# Altium PCB 192dRGB - Copy.PcbDoc
Units mm, origin at the board's own origin, x right, y up, seen from the top; angles counter-clockwise.
Board outline 220.09 x 132.84 mm, 2 copper layers (Top Layer, Bottom Layer); 81 components, 148 nets, 290 pads, 0 vias.
Unrouted connection lines stored in the file: 9.
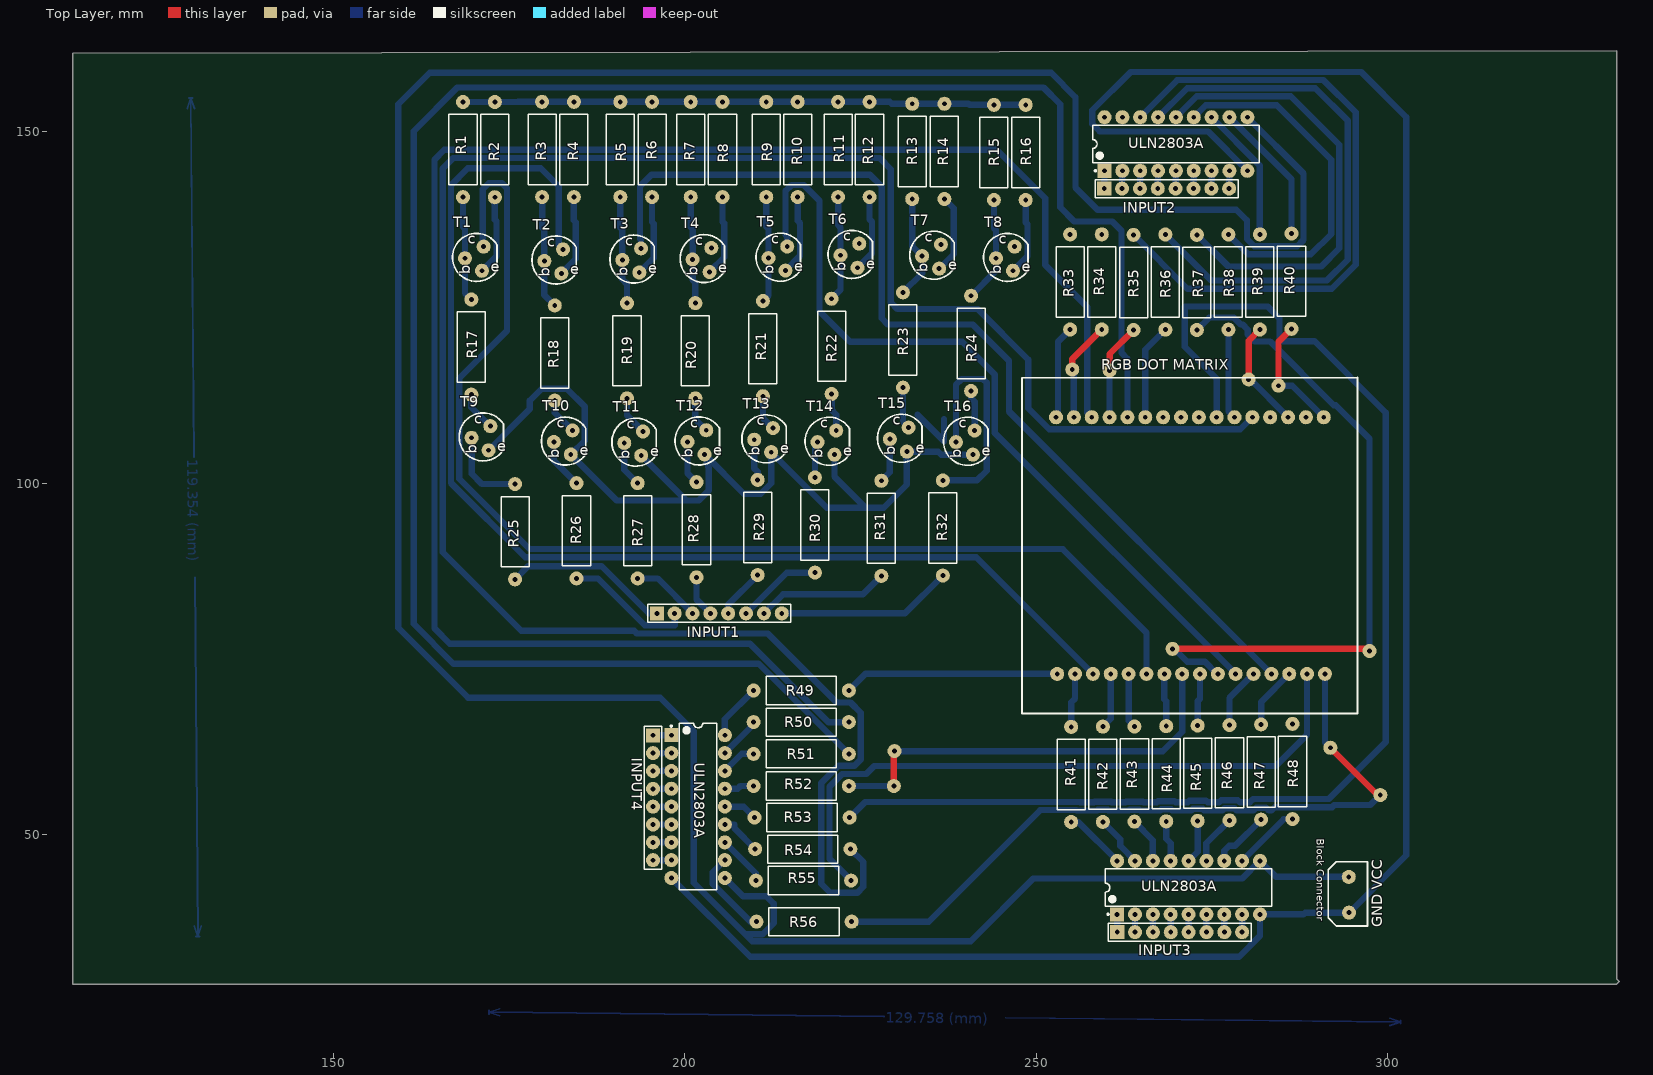
[diagram p0: Top Layer view]
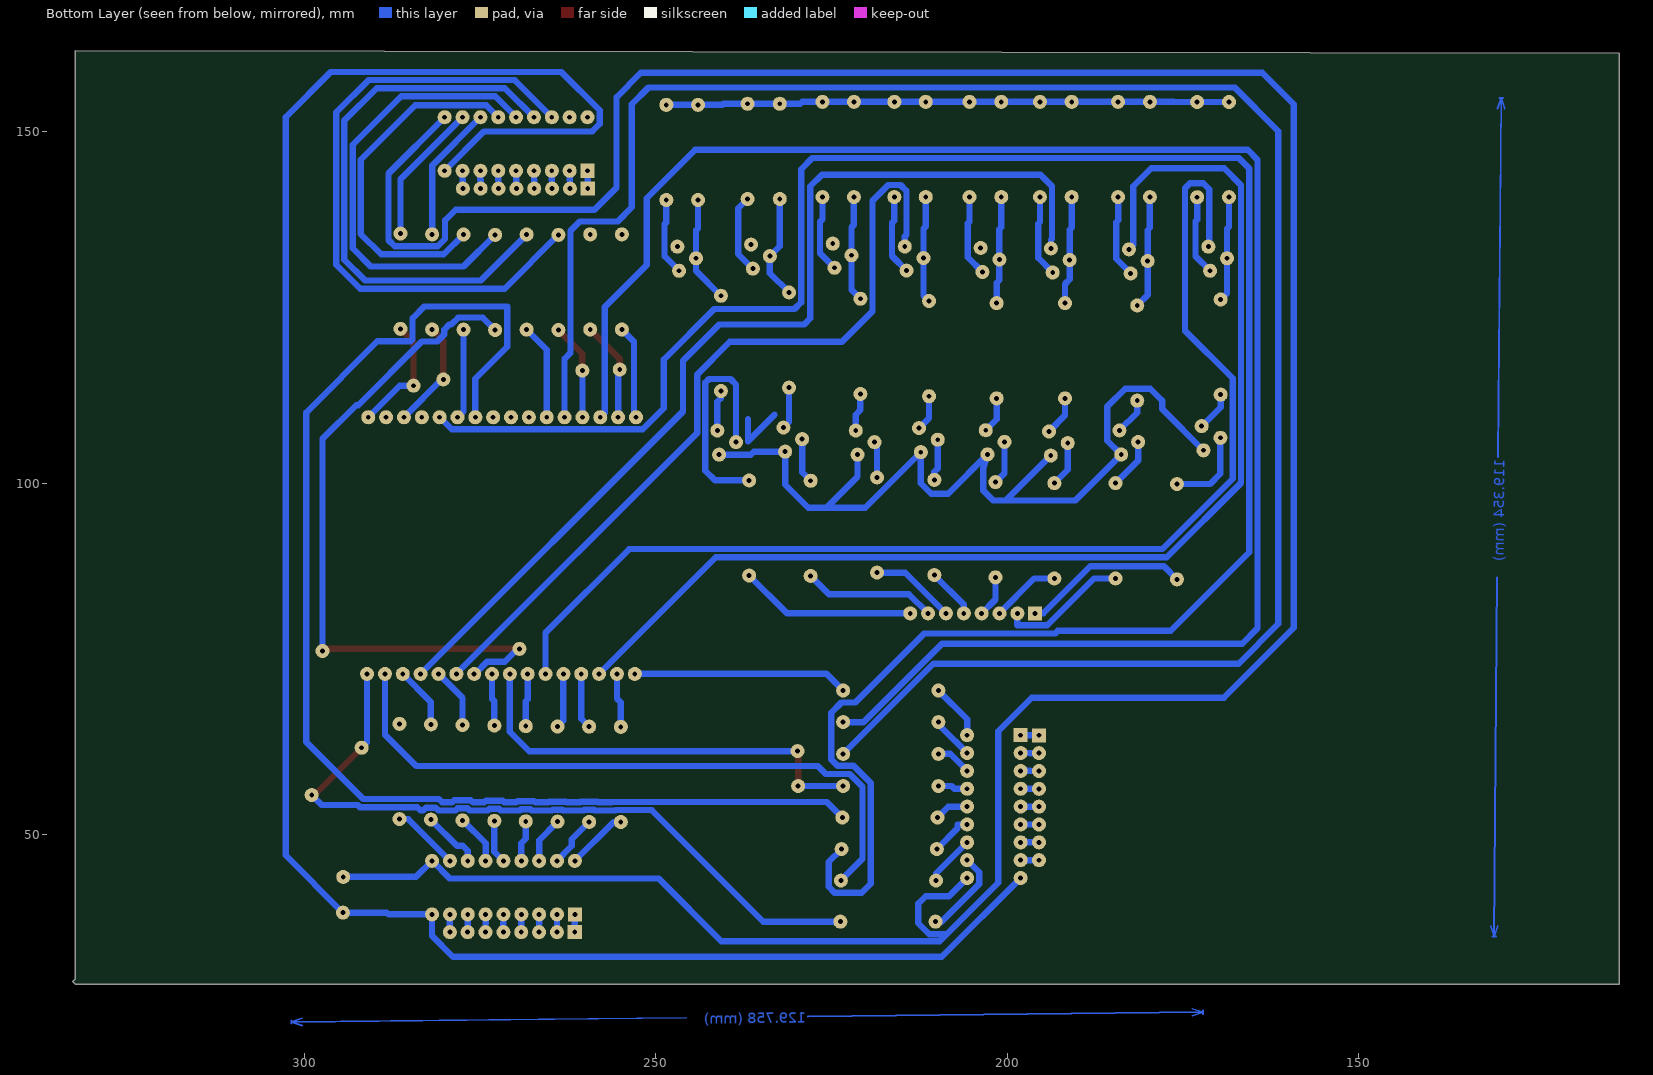
[diagram p1: Bottom Layer view, seen from below]

## Layer stack, top to bottom
Top Layer: signal copper 0.0356
Dielectric: dielectric 0.32, FR-4, Dk 4.8
Bottom Layer: signal copper 0.0356

## Board outline
112.903,161.163 112.903,28.702 332.613,28.702 332.994,29.083 332.613,29.464 332.613,161.544

## Design rules (kind name [scope] priority, off if disabled: settings)
Clearance [All] p1: gap=0.254
PolygonConnect [All] p1: connectstyle=Relief reliefconductorwidth=0.254 reliefentries=4 polygonreliefangle="90 Angle"
RoutingVias [All] p1: holewidth=0.711 width=1.27 viastyle="Through Hole" minholewidth=0.711 minwidth=1.27 maxholewidth=0.711 maxwidth=1.27
SilkscreenOverComponentPads [All] p1: minsilkscreentomaskgap=0.254
SolderMaskExpansion [All] p1: expansion=0.102
Width [All] p1: maxlimit=1 minlimit=0.8 preferedwidth=0.9 minimp=50.000000 maximp=50.000000 favimp=50.000000
27 further rules are at their usual default settings.

## Components (designator, comment, footprint, x,y, rotation, side; value= is the part's Value field where it differs from the comment)
"GND VCC" "Comment" "PCB Block Connector" 294.525,41.425 r270 top
INPUT1 "Comment" HDR1X8 196.025,81.475 r0 top
INPUT2 "Comment" HDR1X8 259.7,141.925 r0 top
INPUT3 "Comment" HDR1X8 261.55,36.1 r0 top
INPUT4 "Comment" HDR1X8 195.475,64.125 r270 top
R1 "Comment" RES13.55-10X4 168.439,147.482 r270 top
R2 "Comment" RES13.55-10X4 172.975,147.475 r270 top
R3 "Comment" RES13.55-10X4 179.7,147.5 r270 top
R4 "Comment" RES13.55-10X4 184.225,147.5 r270 top
R5 "Comment" RES13.55-10X4 190.825,147.5 r270 top
R6 "Comment" RES13.55-10X4 195.35,147.5 r270 top
R7 "Comment" RES13.55-10X4 200.85,147.5 r270 top
R8 "Comment" RES13.55-10X4 205.375,147.5 r270 top
R9 "Comment" RES13.55-10X4 211.6,147.5 r270 top
R10 "Comment" RES13.55-10X4 216.075,147.5 r270 top
R11 "Comment" RES13.55-10X4 221.825,147.5 r270 top
R12 "Comment" RES13.55-10X4 226.3,147.5 r270 top
R13 "Comment" RES13.55-10X4 232.375,147.225 r270 top
R14 "Comment" RES13.55-10X4 236.95,147.225 r270 top
R15 "Comment" RES13.55-10X4 244,147.075 r270 top
R16 "Comment" RES13.55-10X4 248.525,147.075 r270 top
R17 "Comment" RES13.55-10X4 169.625,119.375 r270 top
R18 "Comment" RES13.55-10X4 181.5,118.525 r270 top
R19 "Comment" RES13.55-10X4 191.775,118.85 r270 top
R20 "Comment" RES13.55-10X4 201.5,118.85 r270 top
R21 "Comment" RES13.55-10X4 211.125,119.15 r270 top
R22 "Comment" RES13.55-10X4 220.9,119.475 r270 top
R23 "Comment" RES13.55-10X4 231.05,120.375 r270 top
R24 "Comment" RES13.55-10X4 240.75,119.9 r270 top
R25 "Comment" RES13.55-10X4 175.85,93.1 r270 top
R26 "Comment" RES13.55-10X4 184.6,93.225 r270 top
R27 "Comment" RES13.55-10X4 193.3,93.225 r270 top
R28 "Comment" RES13.55-10X4 201.675,93.375 r270 top
R29 "Comment" RES13.55-10X4 210.375,93.7 r270 top
R30 "Comment" RES13.55-10X4 218.525,94.05 r270 top
R31 "Comment" RES13.55-10X4 227.975,93.575 r270 top
R32 "Comment" RES13.55-10X4 236.725,93.625 r270 top
R33 "Comment" RES13.55-10X4 254.852,128.649 r90 top
R34 "Comment" RES13.55-10X4 259.35,128.65 r90 top
R35 "Comment" RES13.55-10X4 263.875,128.575 r90 top
R36 "Comment" RES13.55-10X4 268.4,128.625 r90 top
R37 "Comment" RES13.55-10X4 272.875,128.575 r90 top
R38 "Comment" RES13.55-10X4 277.375,128.625 r90 top
R39 "Comment" RES13.55-10X4 281.85,128.65 r90 top
R40 "Comment" RES13.55-10X4 286.35,128.75 r90 top
R41 "Comment" RES13.55-10X4 255.001,58.552 r90 top
R42 "Comment" RES13.55-10X4 259.5,58.575 r90 top
R43 "Comment" RES13.55-10X4 264,58.6 r90 top
R44 "Comment" RES13.55-10X4 268.525,58.65 r90 top
R45 "Comment" RES13.55-10X4 273,58.725 r90 top
R46 "Comment" RES13.55-10X4 277.525,58.8 r90 top
R47 "Comment" RES13.55-10X4 282.025,58.9 r90 top
R48 "Comment" RES13.55-10X4 286.5,58.975 r90 top
R49 "Comment" RES13.55-10X4 216.576,70.494 r0 top
R50 "Comment" RES13.55-10X4 216.575,66 r0 top
R51 "Comment" RES13.55-10X4 216.575,61.475 r0 top
R52 "Comment" RES13.55-10X4 216.575,56.9 r0 top
R53 "Comment" RES13.55-10X4 216.7,52.425 r0 top
R54 "Comment" RES13.55-10X4 216.8,47.925 r0 top
R55 "Comment" RES13.55-10X4 216.9,43.45 r0 top
R56 "Comment" RES13.55-10X4 216.975,37.6 r0 top
"RGB DOT MATRIX" "Comment" "RGB 4.7X4.7" 271.975,91.125 r180 top
T1 "Comment" "TO-92 Packaging" 170.05,131.95 r0 top
T2 "Comment" "TO-92 Packaging" 181.35,131.575 r0 top
T3 "Comment" "TO-92 Packaging" 192.45,131.7 r0 top
T4 "Comment" "TO-92 Packaging" 202.45,131.775 r0 top
T5 "Comment" "TO-92 Packaging" 213.25,131.975 r0 top
T6 "Comment" "TO-92 Packaging" 223.5,132.375 r0 top
T7 "Comment" "TO-92 Packaging" 235.125,132.25 r0 top
T8 "Comment" "TO-92 Packaging" 245.625,131.95 r0 top
T9 "Comment" "TO-92 Packaging" 171,106.4 r0 top
T10 "Comment" "TO-92 Packaging" 182.7,105.8 r0 top
T11 "Comment" "TO-92 Packaging" 192.725,105.65 r0 top
T12 "Comment" "TO-92 Packaging" 201.725,105.825 r0 top
T13 "Comment" "TO-92 Packaging" 211.225,106.125 r0 top
T14 "Comment" "TO-92 Packaging" 220.225,105.775 r0 top
T15 "Comment" "TO-92 Packaging" 230.525,106.2 r0 top
T16 "Comment" "TO-92 Packaging" 239.925,105.775 r0 top
ULN2803A "Comment" DIP-18 269.9,148.275 r90 top
ULN2803A "Comment" DIP-18 271.7,42.45 r90 top
ULN2803A "Comment" DIP-18 201.9,53.975 r0 top

## Footprints (in the part's own frame and the unit in brackets; to place one, negate y for a bottom-side part, rotate by r counter-clockwise, add the part's x,y. Pads: shape width x height; smd on the part's side, far side on the other; paste and mask are expansions set on the pad)
DIP-18 [mm] "DIP, 18-Pin, Row Spacing 7.62 mm, Pitch 2.54 mm"
  rect 2x2 hole 0.7: 1(-3.81,10.16)
  round 2 hole 0.7: 2(-3.81,7.62) 3(-3.81,5.08) 4(-3.81,2.54) 5(-3.81,0) 6(-3.81,-2.54) 7(-3.81,-5.08) 8(-3.81,-7.62) 9(-3.81,-10.16) 10(3.81,-10.16) 11(3.81,-7.62) 12(3.81,-5.08) 13(3.81,-2.54) 14(3.81,0) 15(3.81,2.54) 16(3.81,5.08) 17(3.81,7.62) 18(3.81,10.16)
  silkscreen extent -3.93,-11.85 2.65,11.85, body extent -3.6,-11.8 3.6,11.8, height 5.33
HDR1X8 [mm]
  rect 2x2 hole 0.7: 1(0,0)
  round 2 hole 0.7: 2(2.54,0) 3(5.08,0) 4(7.62,0) 5(10.16,0) 6(12.7,0) 7(15.24,0) 8(17.78,0)
  silkscreen extent -1.27,-1.27 19.05,1.27
"PCB Block Connector" [mm]
  round 2 hole 0.7: 1(-2.547,-0.023) 2(2.547,0.023)
  silkscreen extent -4.7,-2.94 4.44,2.65
RES13.55-10X4 [mm] "Resistor, Axial; Body 10 x 4 mm (LxDia. max), Lead Dia. 0.65 mm (max)"
  round 2 hole 0.7: 1(-6.775,0) 2(6.775,0)
  silkscreen extent -5,-2 5,2
"RGB 4.7X4.7" [mm]
  round 2 hole 0.7: 1(-18.967,-18.262) 2(-16.427,-18.262) 3(-13.887,-18.262) 4(-11.347,-18.262) 5(-8.807,-18.262) 6(-6.267,-18.262) 7(-3.727,-18.262) 8(-1.187,-18.262) 9(1.353,-18.262) 10(3.893,-18.262) 11(6.433,-18.262) 12(8.973,-18.262) 13(11.513,-18.262) 14(14.053,-18.262) 15(16.593,-18.262) 16(19.133,-18.262) 17(18.966,18.262) 18(16.426,18.262) 19(13.886,18.262) 20(11.346,18.262) 21(8.806,18.262) 22(6.266,18.262) 23(3.726,18.262) 24(1.186,18.262) 25(-1.354,18.262) 26(-3.894,18.262) 27(-6.434,18.262) 28(-8.974,18.262) 29(-11.514,18.262) 30(-14.054,18.262) 31(-16.594,18.262) 32(-19.134,18.262)
  silkscreen extent -23.78,-23.9 23.99,23.89
"TO-92 Packaging" [mm] "for 2N3904"
  round 2 hole 0.7: T(-1.333,0.064) T(1.08,-1.714) T(1.334,1.715)
  silkscreen extent -3.1,-3.23 3.22,3.61

## Free pads (board coordinates)
  round 2 hole 0.7: 0(229.75,56.9) 1(229.85,61.874) 2(269.425,76.425) 3(297.45,76.125) 4(291.875,62.35) 5(298.987,55.612) 6(255.15,116.175) 7(260.475,116.025) 8(280.25,114.775) 9(284.5,113.875)

## Nets (pads, with @x,y where several pads share a name; then routed paths per layer and width w, separated by ;. In a path a pad name is that pad's centre, name@x,y a point inside that pad or via, vN(x,y) a via of type N, cw(c..) or ccw(c..) an arc to the next point about the centre after c; other vN are vias at no path point)
b1: R1.2 R17.1 T1.T@168.717,132.014 | length 15
  Bottom Layer w0.9: R1.2 168.439,136.498 168.717,136.22 168.717,132.014 168.717,127.059 R17.1
b2: R3.2 R18.1 T2.T@180.017,131.639 | length 16.2
  Bottom Layer w0.9: R3.2 179.7,136.333 180.017,136.017 180.017,131.639 180.017,126.784 R18.1
b3: R5.2 R19.1 T3.T@191.117,131.764 | length 15.5
  Bottom Layer w0.9: R5.2 190.825,136.385 191.117,136.093 191.117,131.764 191.117,129.005 191.775,128.346 R19.1
b4: R7.2 R20.1 T4.T@201.117,131.839 | length 15.4
  Bottom Layer w0.9: R7.2 200.85,136.41 201.117,136.144 201.117,131.839 201.117,128.908 201.5,128.524 R20.1
b5: R9.2 R21.1 T5.T@211.917,132.039 | length 15.3
  Bottom Layer w0.9: R21.1 211.917,126.717 211.917,132.039 211.917,136.22 211.6,136.537 R9.2
b6: R11.2 R22.1 T6.T@222.167,132.439 | length 15.1
  Bottom Layer w0.9: R22.1 222.167,127.517 222.167,132.439 222.167,136.398 221.825,136.739 R11.2
b7: R13.2 R23.1 T7.T@233.792,132.314 | length 15
  Bottom Layer w0.9: R23.1 233.792,129.891 233.792,132.314 232.375,133.73 R13.2
b8: R15.2 R24.1 T8.T@244.292,132.014 | length 15.2
  Bottom Layer w0.9: R24.1 244.292,130.217 244.292,132.014 244.292,135.992 244,136.283 R15.2
b9: R25.1 T9.T@169.667,106.464 | length 11.9
  Bottom Layer w0.9: T9.T@169.667,106.464 169.667,101.346 171.138,99.875 R25.1
b10: R26.1 T10.T@181.367,105.864 | length 7.2
  Bottom Layer w0.9: T10.T@181.367,105.864 181.367,103.234 R26.1
b11: R27.1 T11.T@191.392,105.714 | length 6.5
  Bottom Layer w0.9: T11.T@191.392,105.714 191.392,101.909 R27.1
b12: R28.1 T12.T@200.392,105.889 | length 6.3
  Bottom Layer w0.9: T12.T@200.392,105.889 200.392,101.433 R28.1
b13: R29.1 T13.T@209.892,106.189 | length 5.9
  Bottom Layer w0.9: T13.T@209.892,106.189 209.892,102.097 210.375,101.613 R29.1
b14: R30.1 T14.T@218.892,105.839 | length 5.2
  Bottom Layer w0.9: R30.1 218.525,105.472 T14.T@218.892,105.839
b15: R31.1 T15.T@229.192,106.264 | length 6.4
  Bottom Layer w0.9: R31.1 229.192,101.567 T15.T@229.192,106.264
b16: R32.1 T16.T@238.592,105.839 | length 32.5
  Bottom Layer w0.9: R32.1 241.585,100.4 242.963,101.778 242.963,114.321 242.454,114.829 239.391,114.829 238.592,114.03 T16.T@238.592,105.839
c1: 
c2: 
c3: 
c4: 
c5: 
c6: 
c7: 
c8: 
c9: R17.2 T9.T@172.334,108.115 | length 5.6
  Bottom Layer w0.9: R17.2 169.625,110.823 T9.T@172.334,108.115
c10: R18.2 T10.T@184.034,107.515 | length 5.3
  Bottom Layer w0.9: R18.2 181.5,110.048 T10.T@184.034,107.515
c11: R19.2 T11.T@194.059,107.365 | length 5.7
  Bottom Layer w0.9: R19.2 191.775,109.648 T11.T@194.059,107.365
c12: R20.2 T12.T@203.059,107.54 | length 5.2
  Bottom Layer w0.9: R20.2 201.5,109.098 T12.T@203.059,107.54
c13: R21.2 T13.T@212.559,107.84 | length 5.1
  Bottom Layer w0.9: R21.2 211.125,109.273 T13.T@212.559,107.84
c14: R22.2 T14.T@221.559,107.49 | length 5.5
  Bottom Layer w0.9: R22.2 220.9,110.412 221.559,109.753 T14.T@221.559,107.49
c15: R23.2 T15.T@231.859,107.915 | length 6
  Bottom Layer w0.9: R23.2 231.05,108.723 T15.T@231.859,107.915
c16: R24.2 T16.T@241.259,107.49 | length 5.8
  Bottom Layer w0.9: R24.2 240.75,112.102 241.259,111.593 T16.T@241.259,107.49
c17: 
c18: 
e1: R2.2 T1.T@171.13,130.236 | length 11.4
  Bottom Layer w0.9: T1.T@171.13,130.236 173.203,132.309 173.203,137.286 172.975,137.514 R2.2
e2: R4.2 T2.T@182.43,129.861 | length 11.8
  Bottom Layer w0.9: T2.T@182.43,129.861 184.506,131.937 184.506,137.136 184.225,137.416 R4.2
e3: R6.2 T3.T@193.53,129.986 | length 11.7
  Bottom Layer w0.9: T3.T@193.53,129.986 195.605,132.061 195.605,136.931 195.35,137.187 R6.2
e4: R8.2 T4.T@203.53,130.061 | length 11.6
  Bottom Layer w0.9: T4.T@203.53,130.061 205.613,132.144 205.613,136.982 205.375,137.22 R8.2
e5: R10.2 T5.T@214.33,130.261 | length 11.5
  Bottom Layer w0.9: T5.T@214.33,130.261 216.408,132.339 216.408,137.033 216.075,137.366 R10.2
e6: R12.2 T6.T@224.58,130.661 | length 11.1
  Bottom Layer w0.9: T6.T@224.58,130.661 226.644,132.725 226.644,137.211 226.3,137.555 R12.2
e7: R14.2 T7.T@236.205,130.536 | length 11.3
  Bottom Layer w0.9: T7.T@236.205,130.536 238.277,132.608 238.277,139.123 R14.2
e8: R16.2 T8.T@246.705,130.236 | length 11
  Bottom Layer w0.9: T8.T@246.705,130.236 248.768,132.299 248.768,136.855 248.525,137.098 R16.2
e9: 
e10: 
e11: 
e12: 
e13: 
e14: 
e15: 
e16: 
GND: "GND VCC.2" T9.T@172.08,104.686 T10.T@183.78,104.086 T11.T@193.805,103.936 T12.T@202.805,104.111 T13.T@212.305,104.411 T14.T@221.305,104.061 T15.T@231.605,104.486 T16.T@241.005,104.061 ULN2803A.9 | length 426.8
  Bottom Layer w0.9: T9.T@172.08,104.686 177.952,110.558 177.952,111.76 179.654,113.462 183.21,113.462 185.75,110.922 185.75,106.056 183.78,104.086 190.329,97.536 200.204,97.536 ; T11.T@193.805,103.936 200.204,97.536 ; ULN2803A.9@198.09,43.815 209.317,32.588 278.888,32.588 281.86,35.56 281.86,38.64 288.061,38.64 288.299,38.878 294.548,38.878 302.7,47.03 302.7,152.109 296.28,158.529 263.475,158.529 258.013,153.068 258.013,151.13 259.08,150.063 274.462,150.063 ULN2803A.9@280.06,144.465 ; T14.T@221.305,104.061 221.305,100.945 225.73,96.52 ; T16.T@241.005,104.061 236.493,104.061 236.068,104.486 231.605,104.486 231.605,99.804 228.321,96.52 225.73,96.52 ; 200.204,97.536 201.985,97.536 203.403,98.955 203.403,102.21 202.805,104.111 208.414,98.501 210.82,98.501 212.305,99.986 212.305,104.411 220.195,96.52 225.73,96.52
I1: INPUT1.1 R25.2 | length 23.7
  Bottom Layer w0.9: R25.2 177.688,88.163 188.163,88.163 194.852,81.475 INPUT1.1
I2: INPUT1.2 R26.2 | length 18.4
  Bottom Layer w0.9: R26.2 187.631,86.45 194.31,79.771 198.565,79.771 INPUT1.2
I3: INPUT1.3 R27.2 | length 9.9
  Bottom Layer w0.9: R27.2 196.13,86.45 INPUT1.3
I4: INPUT1.4 R28.2 | length 5.9
  Bottom Layer w0.9: R28.2 201.675,83.445 INPUT1.4
I5: INPUT1.5 R29.2 | length 7.2
  Bottom Layer w0.9: INPUT1.5 206.185,82.735 R29.2
I6: INPUT1.6 R30.2 | length 12.2
  Bottom Layer w0.9: INPUT1.6 214.525,87.275 R30.2
I7: INPUT1.7 R31.2 | length 18.9
  Bottom Layer w0.9: INPUT1.7 213.991,84.201 225.376,84.201 R31.2
I8: INPUT1.8 R32.2 | length 25.1
  Bottom Layer w0.9: INPUT1.8 231.35,81.475 R32.2
I9: INPUT2.1 ULN2803A.1@259.74,144.465 | length 2.6
  Bottom Layer w0.9: INPUT2.1 259.7,143.154 259.74,143.194 ULN2803A.1@259.74,144.465
I10: INPUT2.2 ULN2803A.2@262.28,144.465 | length 2.6
  Bottom Layer w0.9: INPUT2.2 262.24,143.154 262.28,143.194 ULN2803A.2@262.28,144.465
I11: INPUT2.3 ULN2803A.3@264.82,144.465 | length 2.6
  Bottom Layer w0.9: INPUT2.3 264.78,143.154 264.82,143.194 ULN2803A.3@264.82,144.465
I12: INPUT2.4 ULN2803A.4@267.36,144.465 | length 2.6
  Bottom Layer w0.9: INPUT2.4 267.32,143.154 267.36,143.194 ULN2803A.4@267.36,144.465
I13: INPUT2.5 ULN2803A.5@269.9,144.465 | length 2.6
  Bottom Layer w0.9: INPUT2.5 269.86,143.154 269.9,143.194 ULN2803A.5@269.9,144.465
I14: INPUT2.6 ULN2803A.6@272.44,144.465 | length 2.6
  Bottom Layer w0.9: INPUT2.6 272.4,143.154 272.44,143.194 ULN2803A.6@272.44,144.465
I15: INPUT2.7 ULN2803A.7@274.98,144.465 | length 2.6
  Bottom Layer w0.9: INPUT2.7 274.94,143.154 274.98,143.194 ULN2803A.7@274.98,144.465
I16: INPUT2.8 ULN2803A.8@277.52,144.465 | length 2.6
  Bottom Layer w0.9: INPUT2.8 277.48,143.154 277.52,143.194 ULN2803A.8@277.52,144.465
I17: INPUT3.1 ULN2803A.1@261.54,38.64 | length 2.5
  Bottom Layer w0.9: ULN2803A.1@261.54,38.64 261.54,37.373 261.55,37.363 INPUT3.1
I18: INPUT3.2 ULN2803A.2@264.08,38.64 | length 2.5
  Bottom Layer w0.9: ULN2803A.2@264.08,38.64 264.08,37.373 264.09,37.363 INPUT3.2
I19: INPUT3.3 ULN2803A.3@266.62,38.64 | length 2.5
  Bottom Layer w0.9: ULN2803A.3@266.62,38.64 266.62,37.373 266.63,37.363 INPUT3.3
I20: INPUT3.4 ULN2803A.4@269.16,38.64 | length 2.5
  Bottom Layer w0.9: ULN2803A.4@269.16,38.64 269.16,37.373 269.17,37.363 INPUT3.4
I21: INPUT3.5 ULN2803A.5@271.7,38.64 | length 2.5
  Bottom Layer w0.9: ULN2803A.5@271.7,38.64 271.7,37.373 271.71,37.363 INPUT3.5
I22: INPUT3.6 ULN2803A.6@274.24,38.64 | length 2.5
  Bottom Layer w0.9: ULN2803A.6@274.24,38.64 274.24,37.373 274.25,37.363 INPUT3.6
I23: INPUT3.7 ULN2803A.7@276.78,38.64 | length 2.5
  Bottom Layer w0.9: ULN2803A.7@276.78,38.64 276.78,37.373 276.79,37.363 INPUT3.7
I24: INPUT3.8 ULN2803A.8@279.32,38.64 | length 2.5
  Bottom Layer w0.9: ULN2803A.8@279.32,38.64 279.32,37.373 279.33,37.363 INPUT3.8
I25: INPUT4.1 ULN2803A.1@198.09,64.135 | length 2.6
  Bottom Layer w0.9: INPUT4.1 196.774,64.125 196.784,64.135 ULN2803A.1@198.09,64.135
I26: INPUT4.2 ULN2803A.2@198.09,61.595 | length 2.6
  Bottom Layer w0.9: INPUT4.2 196.774,61.585 196.784,61.595 ULN2803A.2@198.09,61.595
I27: INPUT4.3 ULN2803A.3@198.09,59.055 | length 2.6
  Bottom Layer w0.9: INPUT4.3 196.774,59.045 196.784,59.055 ULN2803A.3@198.09,59.055
I28: INPUT4.4 ULN2803A.4@198.09,56.515 | length 2.6
  Bottom Layer w0.9: INPUT4.4 196.774,56.505 196.784,56.515 ULN2803A.4@198.09,56.515
I29: INPUT4.5 ULN2803A.5@198.09,53.975 | length 2.6
  Bottom Layer w0.9: INPUT4.5 196.774,53.965 196.784,53.975 ULN2803A.5@198.09,53.975
I30: INPUT4.6 ULN2803A.6@198.09,51.435 | length 2.6
  Bottom Layer w0.9: INPUT4.6 196.774,51.425 196.784,51.435 ULN2803A.6@198.09,51.435
I31: INPUT4.7 ULN2803A.7@198.09,48.895 | length 2.6
  Bottom Layer w0.9: INPUT4.7 196.774,48.885 196.784,48.895 ULN2803A.7@198.09,48.895
I32: INPUT4.8 ULN2803A.8@198.09,46.355 | length 2.6
  Bottom Layer w0.9: INPUT4.8 196.774,46.345 196.784,46.355 ULN2803A.8@198.09,46.355
VCC: "GND VCC.1" R1.1 R2.1 R3.1 R4.1 R5.1 R6.1 R7.1 R8.1 R9.1 R10.1 R11.1 R12.1 R13.1 R14.1 R15.1 R16.1 ULN2803A.10 | length 513.9
  Bottom Layer w0.9: R1.1 170.688,154.257 170.695,154.25 R2.1 176.301,154.25 176.326,154.275 R3.1 R4.1 R5.1 R6.1 R7.1 R8.1 R9.1 R10.1 R11.1 R12.1 229.184,154.275 229.459,154 R13.1 R14.1 240.386,154 240.536,153.85 R15.1 R16.1 ; ULN2803A.10@205.71,43.815 208.292,41.233 211.592,41.233 212.65,40.175 212.65,37.4 211.075,35.825 208.603,35.825 ; ULN2803A.10@280.06,152.085 288.061,144.084 288.061,134.62 287.162,133.721 281.061,133.721 280.01,134.772 280.01,137.414 278.486,138.938 258.75,138.938 255.6,142.088 255.6,154.94 252.146,158.394 163.694,158.394 159.225,153.925 159.225,79.408 169.164,69.469 196.52,69.469 201.27,64.719 201.27,43.158 208.603,35.825 ; 294.502,43.972 284.148,43.972 281.86,46.26 279.339,43.739 249.606,43.739 240.692,34.825 209.603,34.825 208.603,35.825
y1: "RGB DOT MATRIX.17" R49.2 | length 30.6
  Bottom Layer w0.9: R49.2 225.72,72.863 253.009,72.863
y2: "RGB DOT MATRIX.18" R41.2 | length 7.8
  Bottom Layer w0.9: R41.2 255.001,68.809 255.549,69.356 255.549,72.863
y3: "RGB DOT MATRIX.19" T2.T@182.684,133.29 | length 171.6
  Bottom Layer w0.9: T2.T@182.684,133.29 182.067,133.906 182.067,142.265 179.502,144.831 169.139,144.831 166.726,142.418 166.726,100.022 177.289,89.458 241.493,89.458 258.089,72.863
y4: "RGB DOT MATRIX.20" R42.2 | length 8
  Bottom Layer w0.9: R42.2 260.629,66.479 260.629,72.863
y5: "RGB DOT MATRIX.21" R43.2 | length 7.8
  Bottom Layer w0.9: 263.169,72.863 263.169,66.207 R43.2
y6: "RGB DOT MATRIX.22" T1.T@171.384,133.665 | length 169.2
  Bottom Layer w0.9: T1.T@171.384,133.665 171.247,133.801 171.247,141.834 172.085,142.672 173.99,142.672 174.701,141.961 174.701,121.717 167.919,114.935 167.919,100.635 177.927,90.627 253.821,90.627 265.709,78.74 265.709,72.863
y7: "RGB DOT MATRIX.23" R44.2 | length 7.6
  Bottom Layer w0.9: 268.249,72.863 268.249,69.263 268.525,68.986 R44.2
y8: "RGB DOT MATRIX.24" pad.0 pad.1 R52.2 | length 61.7
  Top Layer w0.9: pad.0 229.75,61.774 pad.1
  Bottom Layer w0.9: R52.2 pad.0 ; pad.1 268.02,61.874 270.789,64.643 270.789,72.863
y9: "RGB DOT MATRIX.25" R45.2 | length 7.5
  Bottom Layer w0.9: R45.2 273,69.012 273.329,69.34 273.329,72.863
y10: "RGB DOT MATRIX.26" pad.2 pad.3 R37.1 | length 99.3
  Top Layer w0.9: pad.2 pad.3@297.15,76.425
  Bottom Layer w0.9: pad.2@269.425,76.65 271.508,74.567 274.034,74.567 275.738,72.863 275.869,72.863 275.475,72.47 ; R37.1 274.646,123.571 278.13,123.571 279.121,122.58 279.395,122.58 280.146,121.829 280.146,121.169 281.144,120.171 283.304,120.171 292.375,111.1 292.659,111.1 297.45,106.308 pad.3
y11: "RGB DOT MATRIX.27" T5.T@214.584,133.69 | length 115.3
  Bottom Layer w0.9: T5.T@214.584,133.69 214.584,135.124 214.351,135.357 214.351,141.605 215.189,142.443 216.941,142.443 219.177,140.208 219.177,124.46 223.52,120.117 239.475,120.117 244.124,115.467 244.124,107.147 278.409,72.863
y12: "RGB DOT MATRIX.28" R46.2 | length 8.7
  Bottom Layer w0.9: R46.2 277.525,69.44 280.949,72.863
y13: "RGB DOT MATRIX.29" T3.T@193.784,133.415 | length 144.1
  Bottom Layer w0.9: T3.T@193.784,133.415 193.784,134.613 193.624,134.772 193.624,142.24 195.275,143.891 226.365,143.891 228.016,142.24 228.016,123.471 228.907,122.58 240.995,122.58 246.151,117.424 246.151,110.2 283.489,72.863
y14: "RGB DOT MATRIX.30" R47.2 | length 8.8
  Bottom Layer w0.9: R47.2 282.025,68.86 286.029,72.863
y15: "RGB DOT MATRIX.31" R55.2 | length 94.3
  Bottom Layer w0.9: R55.2 220.599,46.526 220.599,56.82 222.396,58.617 225.808,58.617 226.932,59.741 284.074,59.741 288.569,64.236 288.569,72.863
y16: "RGB DOT MATRIX.32" pad.4 pad.5 R56.2 | length 104.6
  Top Layer w0.9: pad.4 298.613,55.612 pad.5
  Bottom Layer w0.9: R56.2@223.675,37.6 R56.2 234.704,37.6 250.585,53.481 255.707,53.481 255.767,53.421 258.711,53.421 258.794,53.504 260.206,53.504 260.289,53.421 263.186,53.421 263.294,53.529 264.706,53.529 264.814,53.421 267.661,53.421 267.819,53.579 269.231,53.579 269.389,53.421 272.061,53.421 272.294,53.654 273.706,53.654 273.939,53.421 276.511,53.421 276.819,53.729 278.231,53.729 278.539,53.421 280.911,53.421 281.319,53.829 282.731,53.829 283.139,53.421 283.475,53.421 283.958,53.904 292.136,53.904 292.436,54.204 297.579,54.204 pad.5 ; 291.109,72.863 291.109,63.116 pad.4
y17: "RGB DOT MATRIX.1" pad.9 R40.1 | length 17.2
  Top Layer w0.9: pad.9 284.5,120.125 R40.1
  Bottom Layer w0.9: pad.9 286.454,113.875 290.942,109.387
y18: "RGB DOT MATRIX.2" R48.2
y19: "RGB DOT MATRIX.3" pad.8 R39.1 | length 15.5
  Top Layer w0.9: pad.8 280.25,120.275 R39.1
  Bottom Layer w0.9: pad.8@280.39,114.859 285.862,109.387
y20: "RGB DOT MATRIX.4" T4.T@203.784,133.49
y21: "RGB DOT MATRIX.5" R54.2 | length 312.2
  Bottom Layer w0.9: R54.2 225.4,46.1 225.4,42.545 224.587,41.732 220.701,41.732 219.431,43.002 219.431,57.328 221.874,59.771 224.155,59.771 225.069,60.685 225.069,67.31 223.596,68.783 221.64,68.783 211.807,78.617 193.167,78.617 192.79,78.994 176.733,78.994 165.557,90.17 165.557,144.78 167.056,146.279 227.736,146.279 229.337,144.678 229.337,125.73 230.276,124.79 241.681,124.79 248.875,117.596 248.875,110.687 251.892,107.671 279.065,107.671 280.782,109.387
y22: "RGB DOT MATRIX.6" R38.1 | length 12.8
  Bottom Layer w0.9: R38.1 277.375,110.253 278.242,109.387
y23: "RGB DOT MATRIX.7" R53.2 | length 182.7
  Bottom Layer w0.9: R53.2 225.685,54.635 256.185,54.635 256.245,54.575 258.233,54.575 258.316,54.658 260.684,54.658 260.767,54.575 262.708,54.575 262.816,54.683 265.184,54.683 265.292,54.575 267.183,54.575 267.341,54.733 269.709,54.733 269.867,54.575 271.583,54.575 271.816,54.808 274.184,54.808 274.417,54.575 276.033,54.575 276.341,54.883 278.709,54.883 279.017,54.575 280.433,54.575 280.916,55.058 291.658,55.058 299.775,63.175 299.775,110.054 289.636,120.193 284.914,120.193 284.632,120.475 284.632,123.469 282.956,125.146 271.17,125.146 271.17,119.405 275.702,114.874 275.702,109.387
y24: "RGB DOT MATRIX.8" T6.T@224.834,134.09
y25: "RGB DOT MATRIX.9" T8.T@246.959,133.665
y26: "RGB DOT MATRIX.10" T7.T@236.459,133.965
y27: "RGB DOT MATRIX.11" R36.1 | length 13.6
  Bottom Layer w0.9: 265.542,109.387 265.542,118.992 R36.1
y28: "RGB DOT MATRIX.12" R51.2 | length 286.9
  Bottom Layer w0.9: R51.2 210.505,74.32 167.08,74.32 161.425,79.975 161.425,150.097 167.64,156.312 251.054,156.312 253.441,153.924 253.441,139.258 255.449,137.25 260.818,137.25 262.153,135.915 262.153,118.542 263.002,117.694 263.002,109.387
y29: "RGB DOT MATRIX.13" pad.7 R35.1 | length 13.8
  Top Layer w0.9: pad.7 260.475,118.4 R35.1
  Bottom Layer w0.9: 260.462,109.387 pad.7@260.462,116.025
y30: "RGB DOT MATRIX.14" R50.2 | length 255.5
  Bottom Layer w0.9: R50.2 220.457,66 209.292,77.165 166.573,77.165 164.389,79.35 164.389,146.05 165.786,147.447 244.428,147.447 251.3,140.575 251.3,131.05 257.275,125.075 257.275,110.034 257.922,109.387
y31: "RGB DOT MATRIX.15" pad.6 R34.1 | length 14.2
  Top Layer w0.9: pad.6 255.15,117.675 R34.1
  Bottom Layer w0.9: 255.382,109.387 pad.6@255.382,116.175
y32: "RGB DOT MATRIX.16" R33.1 | length 13.3
  Bottom Layer w0.9: 252.842,109.387 253.125,109.671 253.125,120.147 R33.1
z1: R33.2 ULN2803A.18@259.74,152.085
z2: R34.2 ULN2803A.17@262.28,152.085
z3: R35.2 ULN2803A.16@264.82,152.085 | length 92.7
  Bottom Layer w0.9: R35.2 271.539,127.686 292.1,127.686 295.504,131.089 295.504,152.781 290.91,157.375 270.11,157.375 ULN2803A.16@264.82,152.085
z4: R36.2 ULN2803A.15@267.36,152.085 | length 80.3
  Bottom Layer w0.9: ULN2803A.15@267.36,152.085 271.496,156.221 289.729,156.221 294.335,151.614 294.335,131.801 291.389,128.854 274.946,128.854 R36.2
z5: R37.2 ULN2803A.14@269.9,152.085 | length 65.3
  Bottom Layer w0.9: ULN2803A.14@269.9,152.085 272.882,155.067 286.261,155.067 293.167,148.162 293.167,133.426 290.576,130.835 277.39,130.835 R37.2
z6: R38.2 ULN2803A.13@272.44,152.085 | length 51.1
  Bottom Layer w0.9: ULN2803A.13@272.44,152.085 274.144,153.789 284.254,153.789 291.998,146.044 291.998,135.457 289.108,132.567 280.208,132.567 R38.2
z7: R39.2 ULN2803A.12@274.98,152.085 | length 19.5
  Bottom Layer w0.9: ULN2803A.12@274.98,152.085 281.85,145.215 R39.2
z8: R40.2 ULN2803A.11@277.52,152.085 | length 20.2
  Bottom Layer w0.9: ULN2803A.11@277.52,152.085 286.35,143.255 R40.2
z9: R41.1 ULN2803A.18@261.54,46.26 | length 8.8
  Bottom Layer w0.9: R41.1 256.023,51.777 ULN2803A.18@261.54,46.26
z10: R42.1 ULN2803A.17@264.08,46.26 | length 7.4
  Bottom Layer w0.9: R42.1 261.961,49.339 261.961,48.379 ULN2803A.17@264.08,46.26
z11: R43.1 ULN2803A.16@266.62,46.26 | length 6.7
  Bottom Layer w0.9: R43.1 266.62,49.205 ULN2803A.16@266.62,46.26
z12: R44.1 ULN2803A.15@269.16,46.26 | length 5.9
  Bottom Layer w0.9: R44.1 268.525,49.378 269.16,48.743 ULN2803A.15@269.16,46.26
z13: R45.1 ULN2803A.14@271.7,46.26 | length 6.2
  Bottom Layer w0.9: ULN2803A.14@271.7,46.26 273,47.56 R45.1
z14: R46.1 ULN2803A.13@274.24,46.26 | length 7.1
  Bottom Layer w0.9: ULN2803A.13@274.24,46.26 274.24,48.74 R46.1
z15: R47.1 ULN2803A.12@276.78,46.26 | length 8.5
  Bottom Layer w0.9: ULN2803A.12@276.78,46.26 276.78,47.697 277.495,48.412 278.312,48.412 R47.1
z16: R48.1 ULN2803A.11@279.32,46.26 | length 9.6
  Bottom Layer w0.9: ULN2803A.11@279.32,46.26 285.26,52.2 R48.1
z17: R49.1 ULN2803A.18@205.71,64.135 | length 8.1
  Bottom Layer w0.9: ULN2803A.18@205.71,64.135 205.71,66.403 R49.1
z18: R50.1 ULN2803A.17@205.71,61.595 | length 6
  Bottom Layer w0.9: ULN2803A.17@205.71,61.595 209.25,65.135 R50.1
z19: R51.1 ULN2803A.16@205.71,59.055 | length 5.1
  Bottom Layer w0.9: ULN2803A.16@205.71,59.055 208.13,61.475 R51.1
z20: R52.1 ULN2803A.15@205.71,56.515 | length 4.2
  Bottom Layer w0.9: ULN2803A.15@205.71,56.515 207.543,56.515 207.928,56.9 R52.1
z21: R53.1 ULN2803A.14@205.71,53.975 | length 4.9
  Bottom Layer w0.9: ULN2803A.14@205.71,53.975 208.375,53.975 R53.1
z22: R54.1 ULN2803A.13@205.71,51.435 | length 6.1
  Bottom Layer w0.9: ULN2803A.13@205.71,51.435 207.074,51.435 207.074,50.876 R54.1
z23: R55.1 ULN2803A.12@205.71,48.895 | length 7.3
  Bottom Layer w0.9: ULN2803A.12@205.71,48.895 210.125,44.48 R55.1
z24: R56.1 ULN2803A.11@205.71,46.355 | length 12.4
  Bottom Layer w0.9: ULN2803A.11@205.71,46.355 203.987,44.632 203.987,42.964 209.351,37.6 R56.1@210.1,37.6
z25: 
z26: 
z27: 
z28: 
z29: 
z30: 
z31: 
z32: 
copper on no net: | length 238.1
  Bottom Layer w0.254: 129.213,153.302 129.708,154.83 ; 129.455,154.828 129.962,154.832 ; 130.137,103.687 129.708,154.83 ; 130.188,37 130.709,35.48 ; 130.229,153.31 129.708,154.83 ; 130.28,86.624 130.709,35.48 ; 130.455,35.478 130.962,35.482 ; 131.204,37.008 130.709,35.48 ; 172.136,24.469 172.142,24.977 ; 173.658,24.199 172.139,24.723 ; 173.668,25.215 172.139,24.723 ; 228.356,24.117 172.139,24.723 ; 245.672,23.93 301.889,23.323 ; 300.36,22.832 301.889,23.323 ; 300.371,23.848 301.889,23.323 ; 301.886,23.069 301.892,23.577
  Bottom Layer w0.9: 233.125,109.725 236.888,105.962 236.888,109.112

## Other copper
Bottom Layer:
  text "119.354 (mm)" at 129.225,103.425 h1.52 r270.48
  text "129.758 (mm)" at 228.6,23.2 h1.52 r359.38

## Text inside footprints (layer, text, board x,y; h text height)
"GND VCC": Top Overlay "Block Connector" at 289.953,49.426 h1.02 r270
T1: Top Overlay "b" at 169.479,129.728 h1.52 r90; Top Overlay "e" at 172.4,130.109 h1.5; Top Overlay "c" at 169.098,134.046 h1.5
T2: Top Overlay "b" at 180.779,129.353 h1.52 r90; Top Overlay "e" at 183.7,129.734 h1.5; Top Overlay "c" at 180.398,133.671 h1.5
T3: Top Overlay "b" at 191.879,129.478 h1.52 r90; Top Overlay "e" at 194.8,129.859 h1.5; Top Overlay "c" at 191.498,133.796 h1.5
T4: Top Overlay "b" at 201.879,129.553 h1.52 r90; Top Overlay "e" at 204.8,129.934 h1.5; Top Overlay "c" at 201.498,133.871 h1.5
T5: Top Overlay "b" at 212.679,129.753 h1.52 r90; Top Overlay "e" at 215.6,130.134 h1.5; Top Overlay "c" at 212.298,134.071 h1.5
T6: Top Overlay "b" at 222.929,130.153 h1.52 r90; Top Overlay "e" at 225.85,130.534 h1.5; Top Overlay "c" at 222.548,134.471 h1.5
T7: Top Overlay "b" at 234.554,130.028 h1.52 r90; Top Overlay "e" at 237.475,130.409 h1.5; Top Overlay "c" at 234.173,134.346 h1.5
T8: Top Overlay "b" at 245.054,129.728 h1.52 r90; Top Overlay "e" at 247.975,130.109 h1.5; Top Overlay "c" at 244.673,134.046 h1.5
T9: Top Overlay "b" at 170.429,104.178 h1.52 r90; Top Overlay "e" at 173.35,104.559 h1.5; Top Overlay "c" at 170.048,108.496 h1.5
T10: Top Overlay "b" at 182.129,103.578 h1.52 r90; Top Overlay "e" at 185.05,103.959 h1.5; Top Overlay "c" at 181.748,107.896 h1.5
T11: Top Overlay "b" at 192.154,103.428 h1.52 r90; Top Overlay "e" at 195.075,103.809 h1.5; Top Overlay "c" at 191.773,107.746 h1.5
T12: Top Overlay "b" at 201.154,103.603 h1.52 r90; Top Overlay "e" at 204.075,103.984 h1.5; Top Overlay "c" at 200.773,107.921 h1.5
T13: Top Overlay "b" at 210.654,103.903 h1.52 r90; Top Overlay "e" at 213.575,104.284 h1.5; Top Overlay "c" at 210.273,108.221 h1.5
T14: Top Overlay "b" at 219.654,103.553 h1.52 r90; Top Overlay "e" at 222.575,103.934 h1.5; Top Overlay "c" at 219.273,107.871 h1.5
T15: Top Overlay "b" at 229.954,103.977 h1.52 r90; Top Overlay "e" at 232.875,104.358 h1.5; Top Overlay "c" at 229.573,108.295 h1.5
T16: Top Overlay "b" at 239.354,103.553 h1.52 r90; Top Overlay "e" at 242.275,103.934 h1.5; Top Overlay "c" at 238.973,107.871 h1.5